# EAGLE board SVmitTreiber3LED (EAGLE 6.5.0)
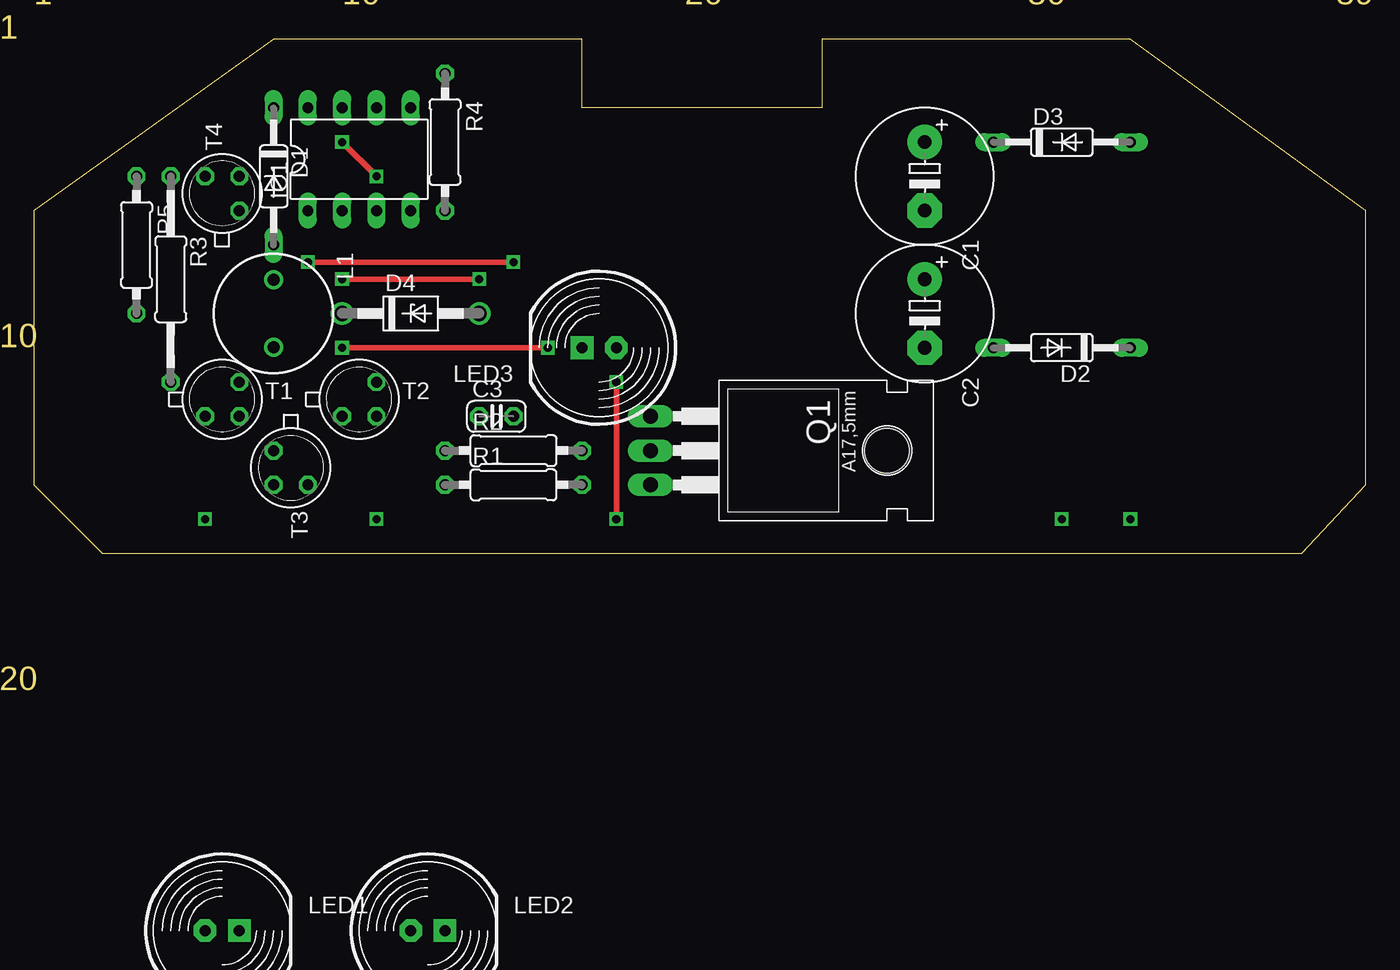
[diagram p0: board, top side]
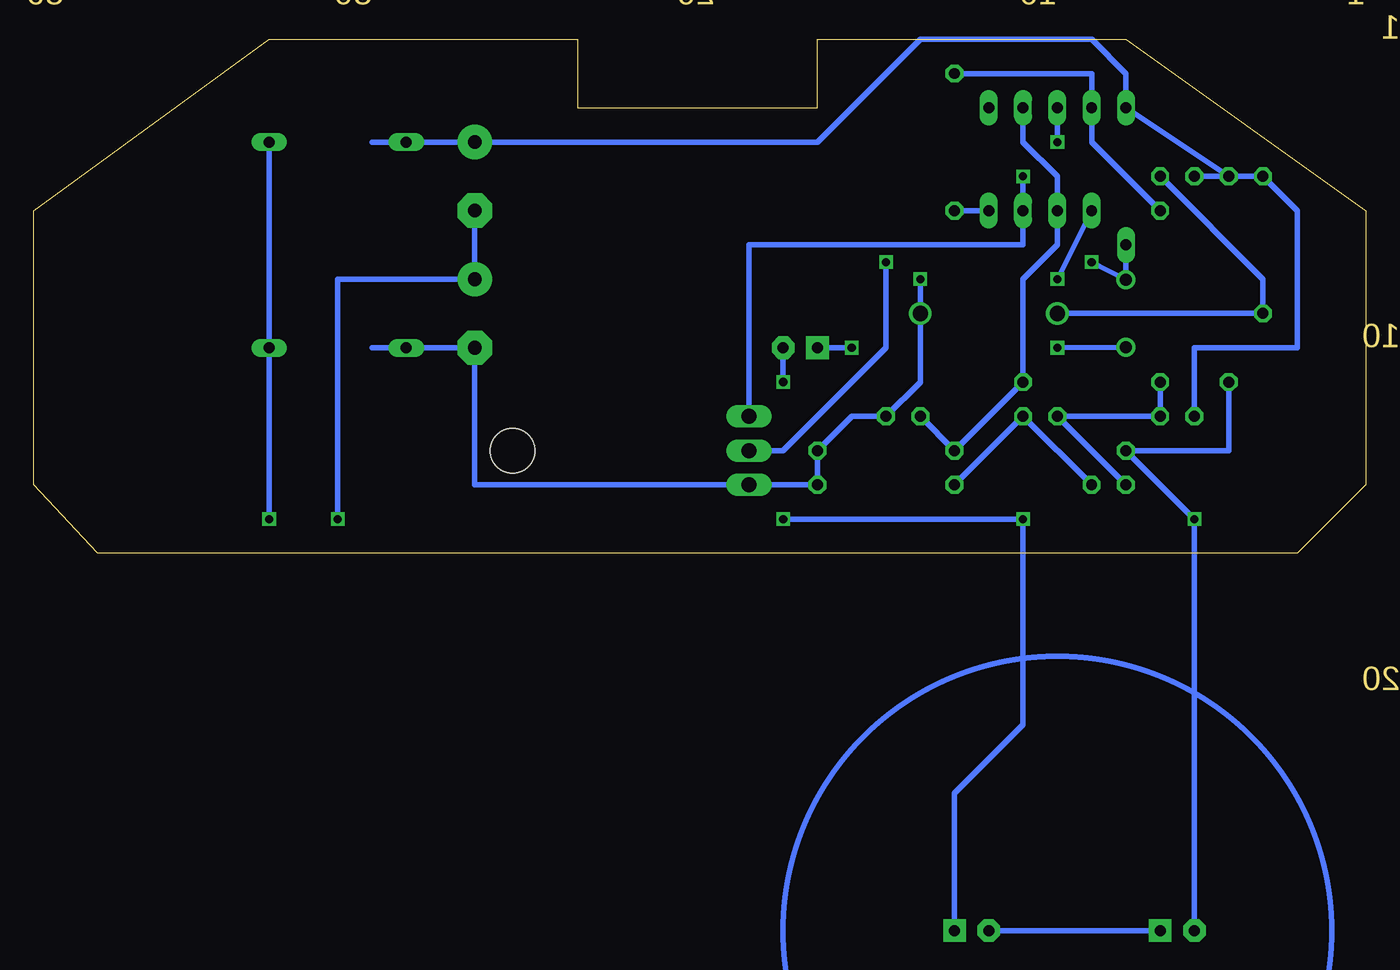
[diagram p1: board, bottom side, seen from below]

Size 98.73 x 38.1 mm. Coordinates in mm from the lower left corner, seen from the top.
Outline: 5.08,0 93.98,0 98.73,5.08 98.73,25.39 81.28,38.09 81.28,38.1 58.42,38.1 58.42,33.02 40.64,33.02 40.64,38.1 17.78,38.1 17.78,38.09 0,25.39 0,5.08 5.08,0
Copper layers (1*16): Top 0.035mm / dielectric 1.5mm / Bottom 0.035mm
Design rules "default": minimum track width 10mil, minimum drill 24mil, track to track 8mil, track to pad 8mil, pad to pad 8mil, via to via 8mil, smd to smd 8mil, copper to edge 40mil, drill to drill 8mil, minimum pad ring 10mil, minimum via ring 8mil, stop-mask expansion 4mil, vias tented up to drill 0mil, thermal gap 10mil

## Footprints (pad centres in the part's own frame; a part is rotated, then mirrored left to right if it is on the bottom)
E5-10,5 = drill 1.016 pad 2.54: + -2.54,0 | drill 1.016 pad 2.54 octagon: - 2.54,0
C025-024X044 = drill 0.813 octagon: 1 -1.27,0; 2 1.27,0
DO35-10 = drill 0.813 long: A 5.08,0; C -5.08,0
DO41Z10 = drill 1.118: A 5.08,0; C -5.08,0
DIL-08 = drill 0.813 long: 1 -3.81,-3.81; 2 -1.27,-3.81; 3 1.27,-3.81; 4 3.81,-3.81; 5 3.81,3.81; 6 1.27,3.81; 7 -1.27,3.81; 8 -3.81,3.81
6000-XXXX-RC = drill 0.9 pad 1.422: 1 -2.5,0; 2 2.5,0
LED10MM = drill 0.813 pad 1.676 octagon: A -1.27,0 | drill 0.813 pad 1.676 square: K 1.27,0
TO220 = drill 1.118 long: 1 -2.54,-6.35; 2 0,-6.35; 3 2.54,-6.35 | hole 3.302: 0,11.176
0207/10 = drill 0.813 octagon: 1 -5.08,0; 2 5.08,0
0207/15 = drill 0.813 octagon: 1 -7.62,0; 2 7.62,0
TO18 = drill 0.813 octagon: 1 -1.27,-1.27; 2 1.27,-1.27; 3 1.27,1.27

## Placement (x,y rotation side)
C1  2200 µF  [E5-10,5]  66.04,27.94 270 top
C2  2200 µF  [E5-10,5]  66.04,17.78 270 top
C3  [C025-024X044]  34.29,10.16 0 top
D1  1N4446  [DO35-10]  17.78,27.94 270 top
D2  1N4148  [DO35-10]  76.2,15.24 180 top
D3  1N4148  [DO35-10]  76.2,30.48 0 top
D4  15 V 1W  [DO41Z10]  27.94,17.78 0 top
IC1  NE555  [DIL-08]  24.13,29.21 0 top
L1  [6000-XXXX-RC]  17.78,17.78 270 top
LED1  [LED10MM]  13.97,-27.94 0 top  (outside the outline)
LED2  [LED10MM]  29.21,-27.94 0 top  (outside the outline)
LED3  [LED10MM]  41.91,15.24 180 top
Q1  BUZ11  [TO220]  52.07,7.62 270 top
R1  100k  [0207/10]  35.56,5.08 0 top
R2  3k9  [0207/10]  35.56,7.62 0 top
R3  0R2  [0207/15]  10.16,20.32 270 top
R4  100k  [0207/10]  30.48,30.48 270 top
R5  3k9  [0207/10]  7.62,22.86 270 top
T1  2N2907  [TO18]  13.97,11.43 0 top
T2  2N2907  [TO18]  24.13,11.43 0 top
T3  2N2907  [TO18]  19.05,6.35 270 top
T4  2N2907  [TO18]  13.97,26.67 90 top

## Library data of the parts
C1-C3 L1 R1-R5 = rcl
D1-D4 = diode
IC1 = st-microelectronics; MF: Arrow Electronics; MPN: NE555N; OC_FARNELL: 1467742; OC_NEWARK: 89K1486
LED1-LED3 = led
Q1 = transistor-fet
T1-T4 = transistor-pnp

## Nets
D1: D2.C D3.A
D2: C1.- C2.+
LV1: LED1.K LED2.A
LV2: C2.- C3.2 D2.A D4.A IC1.1 Q1.3 R1.2 R2.2
N$1: C1.+ D1.C D3.C R3.1 R5.1 T1.1 T4.3
N$2: T1.2 T1.3 T2.1 T3.2
N$3: R1.1 T2.2 T3.3
N$4: C3.1 IC1.2 IC1.6 R2.1 T2.3
N$6: IC1.3 IC1.7 Q1.1
N$7: IC1.4 R4.2
N$8: D1.A L1.1 Q1.2
N$9: LED1.A R3.2 T3.1
N$10: D4.C R5.2 T4.2
N$11: LED2.K LED3.A
N$12: IC1.8 R4.1 T4.1
SW2LV: L1.2 LED3.K

## Tracks (layer width: path | path; a pad name or v marks a point on that pad's centre or on a via)
D1  (via drill 0.6)
  Bottom 0.406: D3.A D2.C v81.28,2.54
D2  (via drill 0.6)
  Bottom 0.406: C1.- C2.+ 76.2,20.32 v76.2,2.54
LV1
  Bottom 0.406: LED1.K LED2.A
LV2  (via drill 0.6)
  Top 0.406: v22.86,20.32 v33.02,20.32
  Bottom 0.406: 73.66,15.24 D2.A C2.- 66.04,5.08 Q1.3 R1.2 R2.2 38.1,10.16 C3.2 33.02,12.7 D4.A v33.02,20.32 | IC1.1 v22.86,20.32
N$1
  Bottom 0.406: 73.66,30.48 D3.C C1.+ 40.64,30.48 33.02,38.1 20.32,38.1 17.78,35.56 D1.C R3.1 | T4.3 R3.1 | R3.1 R5.1 5.08,25.4 5.08,15.24 12.7,15.24 T1.1
N$2
  Bottom 0.406: T1.3 T1.2 T2.1 T3.2
N$3
  Bottom 0.406: T3.3 T2.2 R1.1
N$4
  Bottom 0.406: IC1.6 25.4,30.48 22.86,27.94 IC1.2 22.86,22.86 25.4,20.32 T2.3 R2.1 C3.1
N$5  (via drill 0.6)
  other vias: 12.7,2.54
N$6  (via drill 0.6)
  Top 0.406: v22.86,30.48 v25.4,27.94
  Bottom 0.406: IC1.7 v22.86,30.48 | v25.4,27.94 IC1.3 25.4,22.86 45.72,22.86 Q1.1
N$7
  Bottom 0.406: R4.2 IC1.4
N$8  (via drill 0.6)
  Top 0.406: v35.56,21.59 v20.32,21.59
  Bottom 0.406: D1.A L1.1 v20.32,21.59 | Q1.2 43.18,7.62 35.56,15.24 v35.56,21.59
N$9
  Bottom 0.406: R3.2 10.16,7.62 T3.1 12.7,2.54 LED1.A
N$10
  Bottom 0.406: T4.2 7.62,20.32 R5.2 D4.C
N$11  (via drill 0.6)
  Top 0.406: v43.18,12.7 v43.18,2.54
  Bottom 0.406: LED3.A v43.18,12.7 | v43.18,2.54 25.4,2.54 25.4,-12.7 30.48,-17.78 LED2.K
N$12
  Bottom 0.406: R4.1 20.32,35.56 IC1.8 20.32,30.48 T4.1
N$13  (via drill 0.6)
  other vias: 25.4,2.54
SW2LV  (via drill 0.6)
  Top 0.406: v22.86,15.24 v38.1,15.24
  Bottom 0.406: L1.2 v22.86,15.24 | v38.1,15.24 LED3.K
(copper drawn outside any net)
  shapes: Bottom circle x1

## Text on the board
Dimension: 1 | 10 | 20 | 30 | 39 | 1 | 10 | 20